# Altium PCB PCB1.PcbDoc
Units mm, origin at the board's own origin, x right, y up, seen from the top; angles counter-clockwise.
Board outline 83.06 x 84.33 mm, 2 copper layers (Top Layer, Bottom Layer); 15 components, 21 nets, 99 pads, 5 vias.
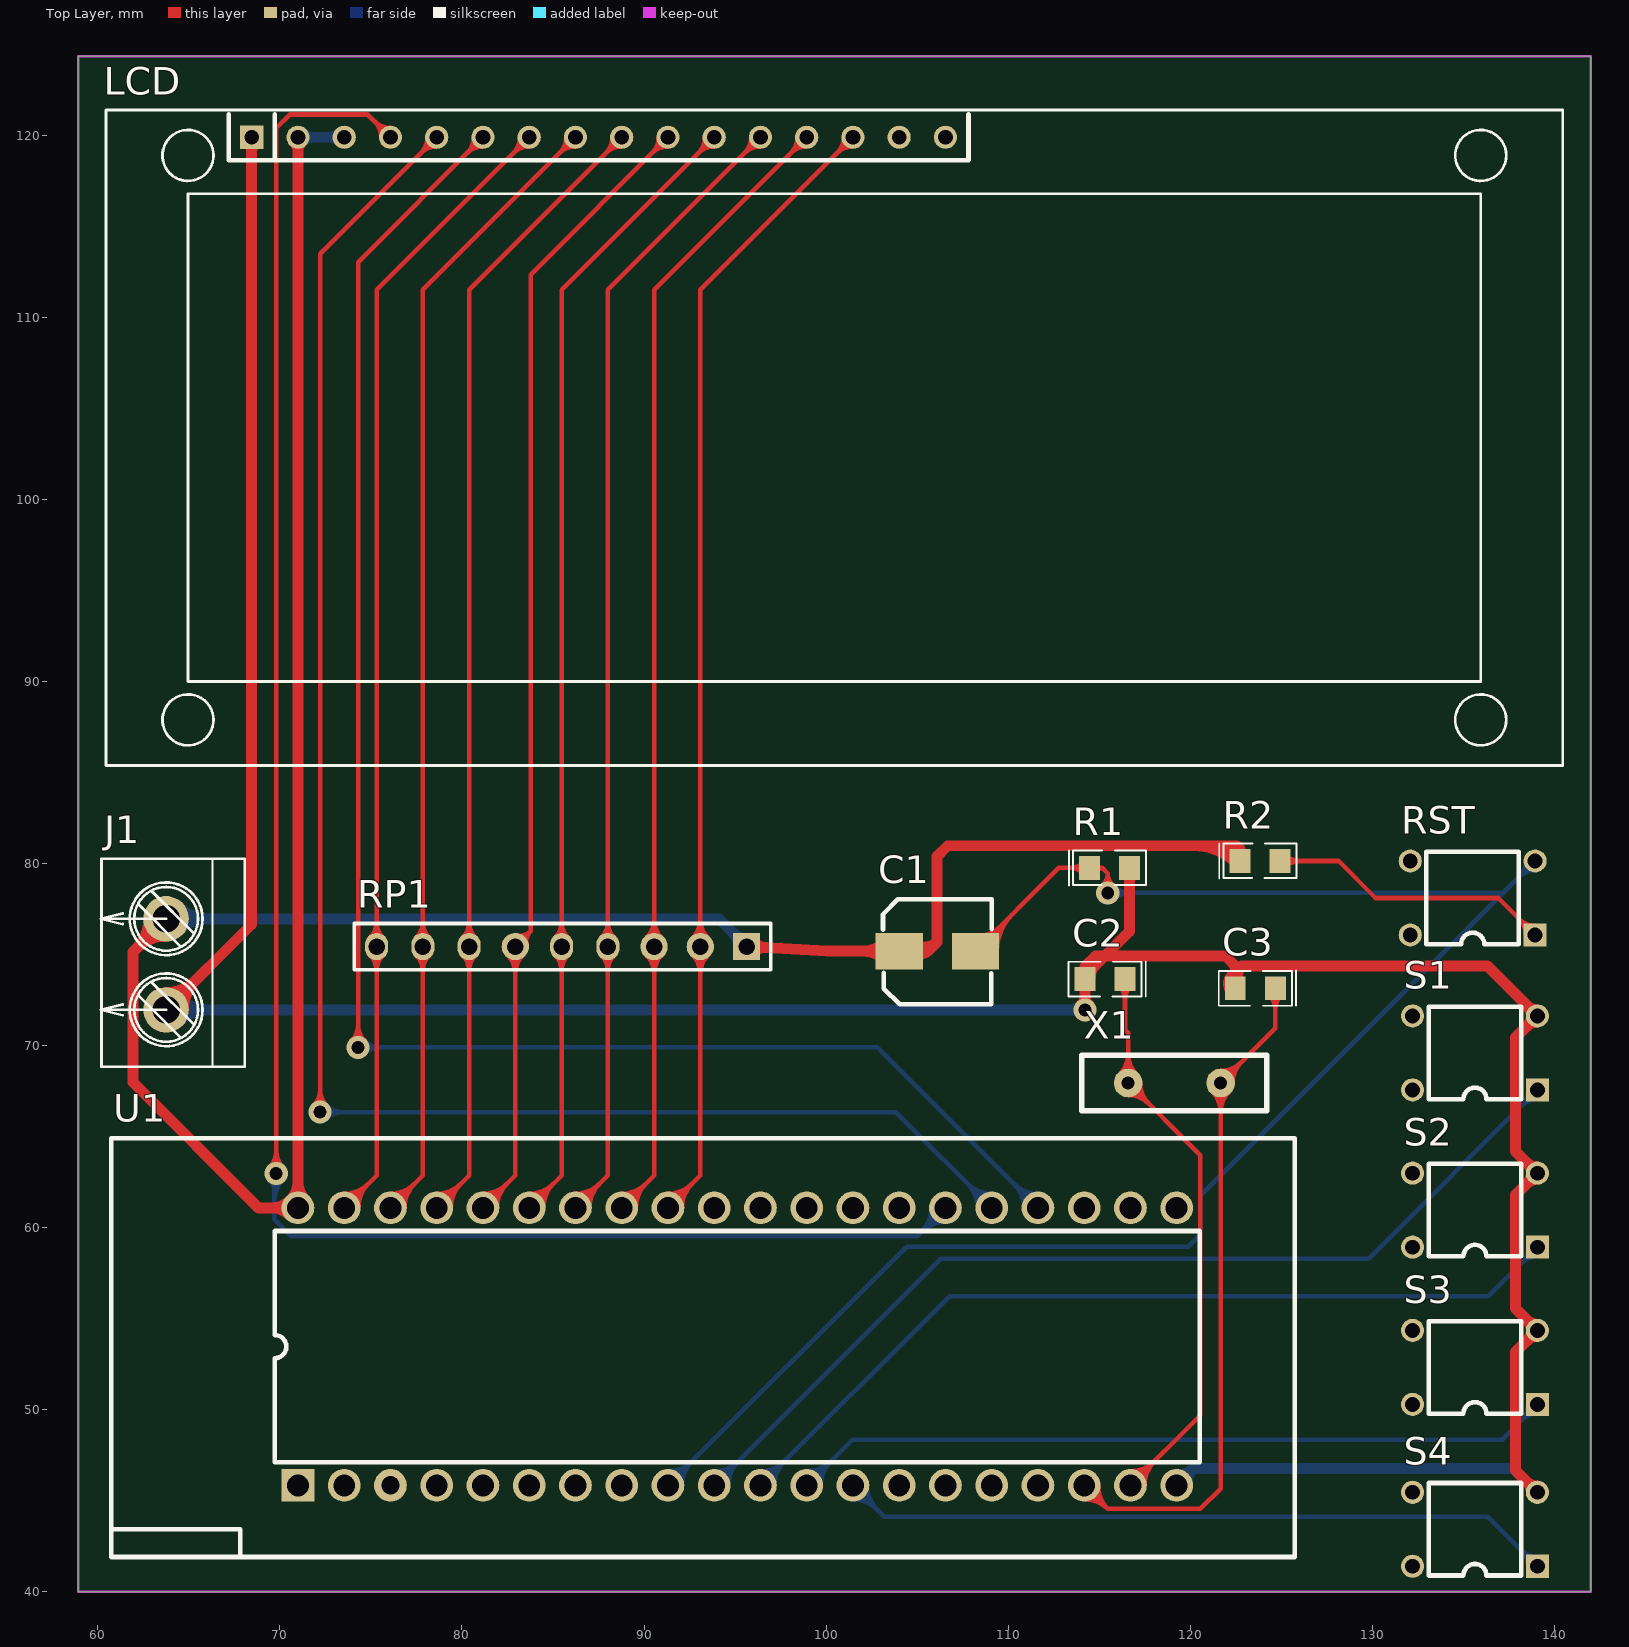
[diagram p0: Top Layer view]
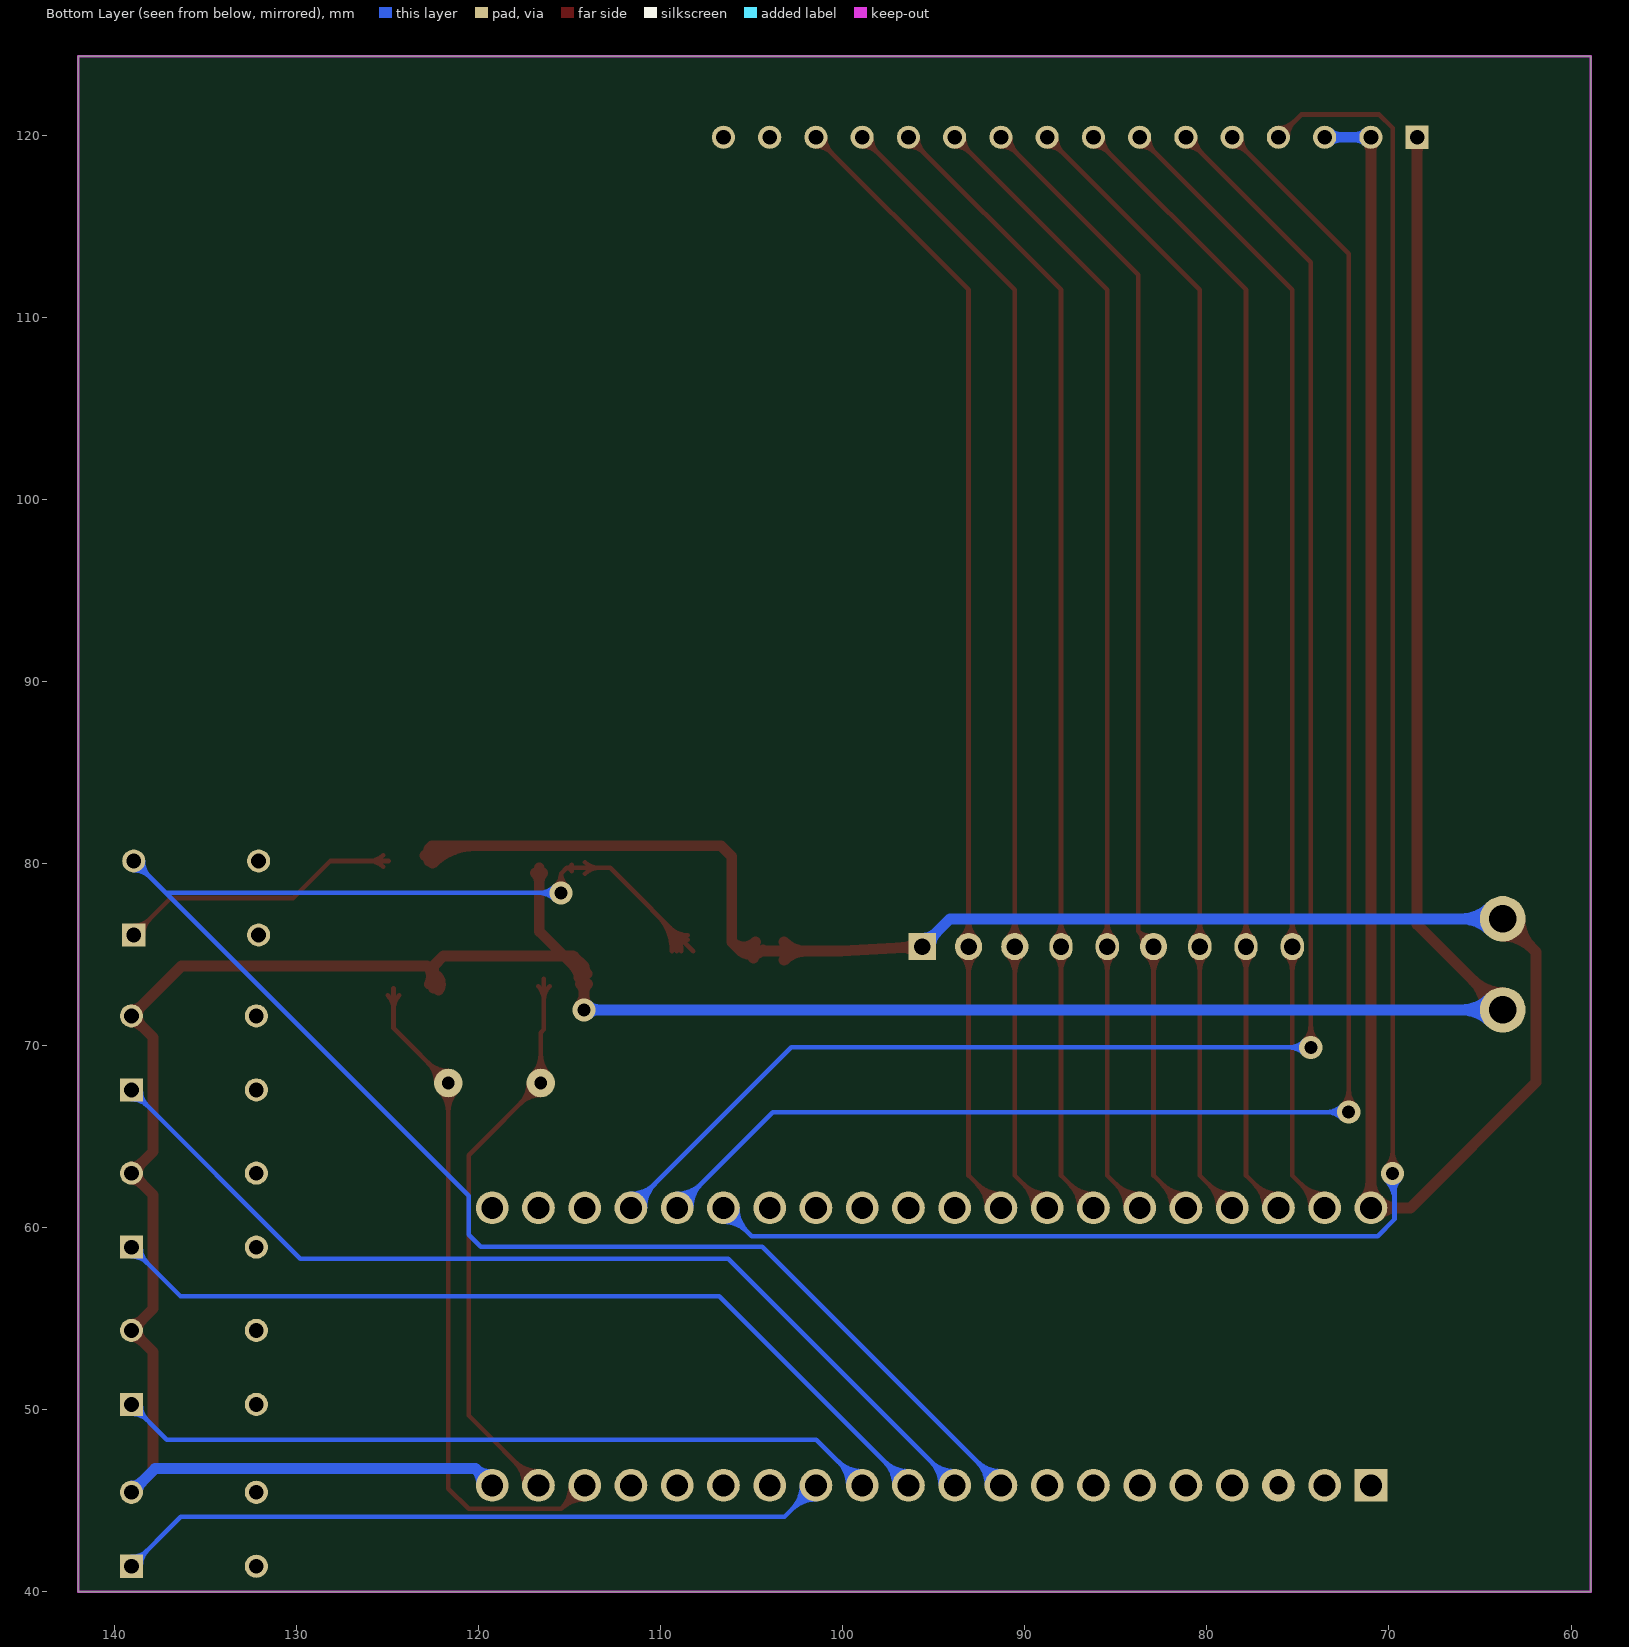
[diagram p1: Bottom Layer view, seen from below]
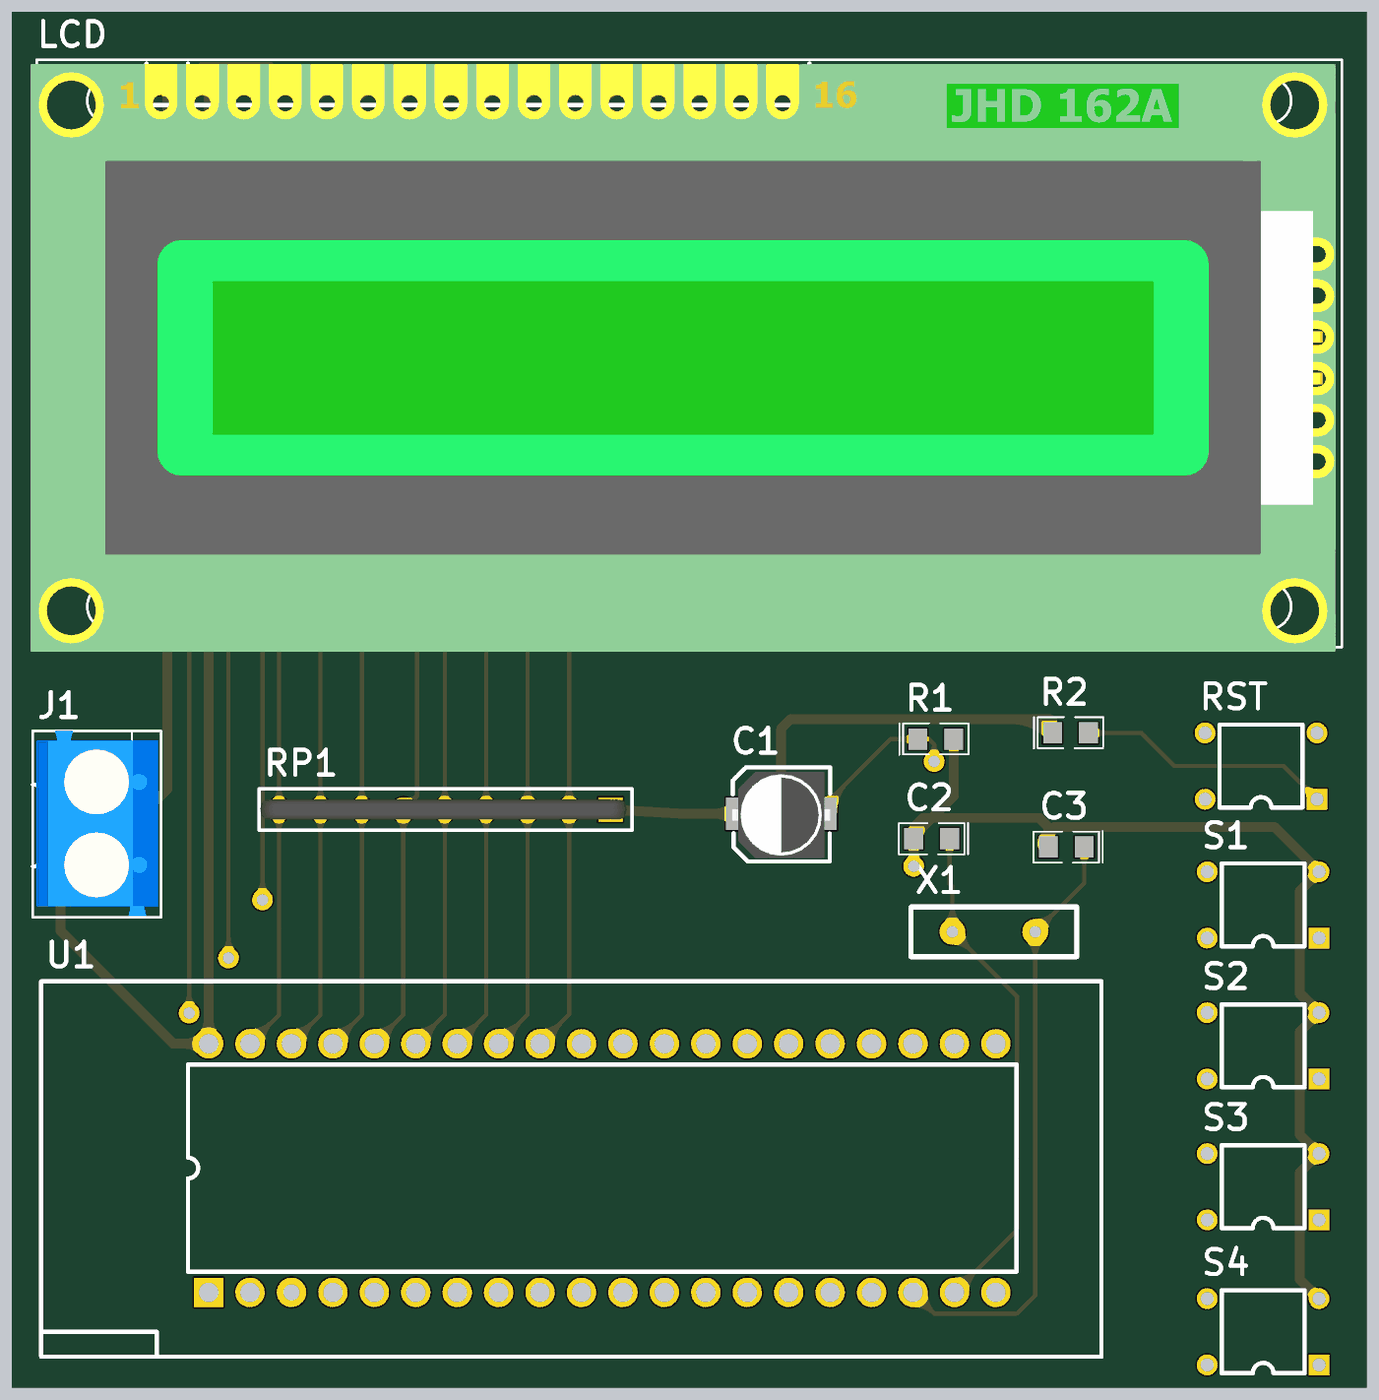
[diagram p2: 3D render of the assembled board from above, using the file's embedded part models]

## Layer stack, top to bottom
Top Solder: solder mask 0.0102, Solder Resist, Dk 3.5
Top Layer: signal copper 0.0356
Dielectric 1: dielectric 0.32, FR-4, Dk 4.8
Bottom Layer: signal copper 0.0356
Bottom Solder: solder mask 0.0102, Solder Resist, Dk 3.5

## Board outline
58.928,40.005 58.928,124.333 141.986,124.333 141.986,40.005

## Design rules (kind name [scope] priority, off if disabled: settings)
Clearance [All] p1: gap=0.254
PolygonConnect [All] p1: connectstyle=Relief reliefconductorwidth=0.254 reliefentries=4 polygonreliefangle="90 Angle" airgapwidth=0.254
RoutingVias [All] p1: holewidth=0.711 width=1.27 viastyle="Through Hole" minholewidth=0.711 minwidth=1.27 maxholewidth=0.711 maxwidth=1.27
SolderMaskExpansion [All] p1: expansion=0.102
Width Width_1 [InNetClass('New Class 1')] p1: maxlimit=0.254 minlimit=0.254 preferedwidth=0.254
Width [InNetClass('New Class')] p2: maxlimit=0.6 minlimit=0.254 preferedwidth=0.6
29 further rules are at their usual default settings.

## Classes and differential pairs
net class "New Class 1": D0 D1 D2 D3 D4 D5 D6 D7 EN NetC1_2 NetC2_1 NetC3_1 NetR2_2 P30 P31 P32 P33 RS WR
net class "New Class": GND VCC

## Components (designator, comment, footprint, x,y, rotation, side; value= is the part's Value field where it differs from the comment)
C1 "10uf" C_SMT-5*5 104.013,75.184 r0 top
C2 "30" C0805 115.316,73.66 r180 top
C3 "30" C0805 123.571,73.152 r180 top
J1 "CON2" TC2 63.754,76.962 r270 top
LCD "1602" LCD1602 68.453,119.888 r0 top
R1 "10K" C0805 115.57,79.756 r0 top
R2 "10K" C0805 123.825,80.137 r0 top
RP1 "103" R-9PIN 95.631,75.438 r180 top
RST "SW-PB" ANJIAN 135.509,75.565 r180 top
S1 "SW-PB" ANJIAN 135.636,67.056 r180 top
S2 "SW-PB" ANJIAN 135.636,58.42 r180 top
S3 "SW-PB" ANJIAN 135.636,49.784 r180 top
S4 "SW-PB" ANJIAN 135.636,40.894 r180 top
U1 "AT89C52" JINSUOZUO 125.73,41.91 r90 top
X1 "12MHz" XTAL1 116.586,67.945 r0 top

## Footprints (in the part's own frame and the unit in brackets; to place one, negate y for a bottom-side part, rotate by r counter-clockwise, add the part's x,y. Pads: shape width x height; smd on the part's side, far side on the other; paste and mask are expansions set on the pad)
ANJIAN [mil]
  rect 50x50 hole 32: 1(-135,-20)
  round 50 hole 32: 2(-135,-180) 3(135,-180) 4(135,-20)
  silkscreen extent -100,-200 100,0
C0805 [mm]
  rect 1.15x1.3 smd: 1(-1.1,0) 2(1.1,0)
  silkscreen extent -2.24,-0.97 2.01,0.97, body extent -0.97,-0.61 1.03,0.6, height 0.5
C_SMT-5*5 [mm] "贴片铝电解电容 5*5   22uf"
  rect 2.6x2 smd: 1(0,0) 2(4.191,0)
  silkscreen extent -0.89,-2.92 5.08,2.84, body extent -0.92,-2.73 5.08,2.57, height 5.9
JINSUOZUO [mm]
  rect 1.8x1.8 hole 1.2: 1(3.937,54.737)
  round 1.8 hole 1.2: 2(3.937,52.197) 4(3.937,47.117) 5(3.937,44.577) 6(3.937,42.037) 7(3.937,39.497) 8(3.937,36.957) 9(3.937,34.417) 10(3.937,31.877) 11(3.937,29.337) 12(3.937,26.797) 13(3.937,24.257) 14(3.937,21.717) 15(3.937,19.177) 16(3.937,16.637) 17(3.937,14.097) 18(3.937,11.557) 19(3.937,9.017) 20(3.937,6.477) 21(19.177,6.477) 22(19.177,9.017) 23(19.177,11.557) 24(19.177,14.097) 25(19.177,16.637) 26(19.177,19.177) 27(19.177,21.717) 28(19.177,24.257) 29(19.177,26.797) 30(19.177,29.337) 31(19.177,31.877) 32(19.177,34.417) 33(19.177,36.957) 34(19.177,39.497) 35(19.177,42.037) 36(19.177,44.577) 37(19.177,47.117) 38(19.177,49.657) 39(19.177,52.197) 40(19.177,54.737)
  round 1.8 hole 1: 3(3.937,49.657)
  silkscreen extent 0,0 23,65
LCD1602 [mil]
  rect 50x50 hole 32: 1(0,0)
  round 50 hole 32: 2(100,0) 3(200,0) 4(300,0) 5(400,0) 6(500,0) 7(600,0) 8(700,0) 9(800,0) 10(900,0) 11(1000,0) 12(1100,0) 13(1200,0) 14(1300,0) 15(1400,0) 16(1500,0)
  silkscreen extent -315,-1358 2835,59, body extent -330,-1369 2820,49, height 417
R-9PIN [mm]
  rect 1.5x1.5 hole 0.9: 1(0,0)
  round 1.5 hole 0.9: 2(2.54,0) 3(5.08,0) 6(12.7,0)
  oval 1.27x1.5 hole 0.9: 4(7.62,0) 5(10.16,0) 7(15.24,0) 8(17.78,0) 9(20.32,0)
  silkscreen extent -1.32,-1.27 21.54,1.27, body extent -1.01,-0.63 21.49,0.61, height 5.3
TC2 [mm] "2头接线端子（5.08）"
  round 2.5 hole 1.5: 1(0,0) 2(5,0)
  silkscreen extent -3.3,-3.59 8.13,4.32, body extent -3.31,-3.33 8.05,4.17, height 10.25
XTAL1 [mil]
  round 62 hole 28: 1(0,0) 2(200,0)
  silkscreen extent -100,-60 300,60

## Part data
C1: library part 电解电容, "Capacitor"
C2 C3: library part CAP, "Capacitor"
J1: "Connector"
LCD: library part LCM1602
R1 R2: library part RES2
RP1: library part RP8
U1: library part AT89C51, "8-Bit Microcontroller with 4K Flash ROM"
X1: library part CRYSTAL, "Crystal"

## Via types
v1: diameter 1.27, hole 0.711, Top Layer to Bottom Layer, 5 vias

## Nets (pads, with @x,y where several pads share a name; then routed paths per layer and width w, separated by ;. In a path a pad name is that pad's centre, name@x,y a point inside that pad or via, vN(x,y) a via of type N, cw(c..) or ccw(c..) an arc to the next point about the centre after c; other vN are vias at no path point)
D0: LCD.7 RP1.9 U1.39 | length 73.7
  Top Layer w0.254: U1.39 75.311,62.865 RP1.9 75.311,111.506 LCD.7 ; U1.39@73.533,61.606 ccw(c73.533,62.859) 74.419,61.973 ccw(c75.305,61.087) U1.39@74.052,61.087 ; U1.39@73.533,61.86 ccw(c73.533,63.726) 74.853,62.407 ccw(c76.172,61.087) U1.39@74.306,61.087 ; RP1.9@74.952,74.964 cw(c74.085,74.097) 75.311,74.097 cw(c76.537,74.097) RP1.9@75.67,74.964 ; RP1.9@74.952,75.912 ccw(c74.085,76.779) 75.311,76.779 ccw(c76.537,76.779) RP1.9@75.67,75.912 ; LCD.7@83.185,119.888 cw(c81.959,119.888) 82.826,119.021 cw(c83.693,118.154) LCD.7@83.693,119.38
D1: LCD.8 RP1.8 U1.38 | length 73.7
  Top Layer w0.254: U1.38 77.851,62.865 RP1.8 77.851,111.506 LCD.8 ; U1.38@76.073,61.606 ccw(c76.073,62.859) 76.959,61.973 ccw(c77.845,61.087) U1.38@76.592,61.087 ; U1.38@76.073,61.86 ccw(c76.073,63.726) 77.393,62.407 ccw(c78.712,61.087) U1.38@76.846,61.087 ; RP1.8@77.492,74.964 cw(c76.625,74.097) 77.851,74.097 cw(c79.077,74.097) RP1.8@78.21,74.964 ; RP1.8@77.492,75.912 ccw(c76.625,76.779) 77.851,76.779 ccw(c79.077,76.779) RP1.8@78.21,75.912 ; LCD.8@85.725,119.888 cw(c84.499,119.888) 85.366,119.021 cw(c86.233,118.154) LCD.8@86.233,119.38
D2: LCD.9 RP1.7 U1.37 | length 73.7
  Top Layer w0.254: U1.37 80.391,62.865 RP1.7 80.391,111.506 LCD.9 ; U1.37@78.613,61.606 ccw(c78.613,62.859) 79.499,61.973 ccw(c80.385,61.087) U1.37@79.132,61.087 ; U1.37@78.613,61.86 ccw(c78.613,63.726) 79.933,62.407 ccw(c81.252,61.087) U1.37@79.386,61.087 ; RP1.7@80.032,74.964 cw(c79.165,74.097) 80.391,74.097 cw(c81.617,74.097) RP1.7@80.75,74.964 ; RP1.7@80.032,75.912 ccw(c79.165,76.779) 80.391,76.779 ccw(c81.617,76.779) RP1.7@80.75,75.912 ; LCD.9@88.265,119.888 cw(c87.039,119.888) 87.906,119.021 cw(c88.773,118.154) LCD.9@88.773,119.38
D3: LCD.10 RP1.6 U1.36 | length 75.2
  Top Layer w0.254: U1.36 82.931,62.865 RP1.6 83.769,76.276 ; U1.36@81.153,61.606 ccw(c81.153,62.859) 82.039,61.973 ccw(c82.925,61.087) U1.36@81.672,61.087 ; U1.36@81.153,61.86 ccw(c81.153,63.726) 82.473,62.407 ccw(c83.792,61.087) U1.36@81.926,61.087 ; RP1.6@82.49,74.997 cw(c81.427,73.934) 82.931,73.934 cw(c84.435,73.934) RP1.6@83.372,74.997 ; RP1.6@82.67,75.177 cw(c82.04,74.547) 82.931,74.547 cw(c83.822,74.547) RP1.6@83.192,75.177 ; RP1.6@83.044,76.051 ccw(c83.192,76.853) 83.769,76.276 ; RP1.6@83.544,75.551 cw(c84.346,75.699) 83.769,76.276 ; LCD.10@90.805,119.888 cw(c89.579,119.888) 90.446,119.021 cw(c91.313,118.154) LCD.10@91.313,119.38 ; LCD.10 83.769,112.344 83.769,76.276
D4: LCD.11 RP1.5 U1.35 | length 73.7
  Top Layer w0.254: U1.35 85.471,62.865 RP1.5 85.471,111.506 LCD.11 ; U1.35@83.693,61.606 ccw(c83.693,62.859) 84.579,61.973 ccw(c85.465,61.087) U1.35@84.212,61.087 ; U1.35@83.693,61.86 ccw(c83.693,63.726) 85.013,62.407 ccw(c86.332,61.087) U1.35@84.466,61.087 ; RP1.5@85.112,74.964 cw(c84.245,74.097) 85.471,74.097 cw(c86.697,74.097) RP1.5@85.83,74.964 ; RP1.5@85.112,75.912 ccw(c84.245,76.779) 85.471,76.779 ccw(c86.697,76.779) RP1.5@85.83,75.912 ; LCD.11@93.345,119.888 cw(c92.119,119.888) 92.986,119.021 cw(c93.853,118.154) LCD.11@93.853,119.38
D5: LCD.12 RP1.4 U1.34 | length 73.7
  Top Layer w0.254: U1.34 88.011,62.865 RP1.4 88.011,111.506 LCD.12 ; U1.34@86.233,61.606 ccw(c86.233,62.859) 87.119,61.973 ccw(c88.005,61.087) U1.34@86.752,61.087 ; U1.34@86.233,61.86 ccw(c86.233,63.726) 87.553,62.407 ccw(c88.872,61.087) U1.34@87.006,61.087 ; RP1.4@87.652,74.964 cw(c86.785,74.097) 88.011,74.097 cw(c89.237,74.097) RP1.4@88.37,74.964 ; RP1.4@87.652,75.912 ccw(c86.785,76.779) 88.011,76.779 ccw(c89.237,76.779) RP1.4@88.37,75.912 ; LCD.12@95.885,119.888 cw(c94.659,119.888) 95.526,119.021 cw(c96.393,118.154) LCD.12@96.393,119.38
D6: LCD.13 RP1.3 U1.33 | length 77.4
  Top Layer w0.254: U1.33 90.551,62.865 RP1.3 90.551,111.506 LCD.13 ; U1.33@88.773,61.606 ccw(c88.773,62.859) 89.659,61.973 ccw(c90.545,61.087) U1.33@89.292,61.087 ; U1.33@88.773,61.86 ccw(c88.773,63.726) 90.093,62.407 ccw(c91.412,61.087) U1.33@89.546,61.087 ; RP1.3@90.11,74.997 cw(c89.047,73.934) 90.551,73.934 cw(c92.055,73.934) RP1.3@90.992,74.997 ; RP1.3@90.11,75.879 ccw(c89.047,76.942) 90.551,76.942 ccw(c92.055,76.942) RP1.3@90.992,75.879 ; RP1.3@90.29,75.177 cw(c89.66,74.547) 90.551,74.547 cw(c91.442,74.547) RP1.3@90.812,75.177 ; RP1.3@90.29,75.699 ccw(c89.66,76.329) 90.551,76.329 ccw(c91.442,76.329) RP1.3@90.812,75.699 ; LCD.13@98.425,119.888 cw(c97.199,119.888) 98.066,119.021 cw(c98.933,118.154) LCD.13@98.933,119.38
D7: LCD.14 RP1.2 U1.32 | length 77.4
  Top Layer w0.254: U1.32 93.091,62.865 RP1.2 93.091,111.506 LCD.14 ; U1.32@91.313,61.606 ccw(c91.313,62.859) 92.199,61.973 ccw(c93.085,61.087) U1.32@91.832,61.087 ; U1.32@91.313,61.86 ccw(c91.313,63.726) 92.633,62.407 ccw(c93.952,61.087) U1.32@92.086,61.087 ; RP1.2@92.65,74.997 cw(c91.587,73.934) 93.091,73.934 cw(c94.595,73.934) RP1.2@93.532,74.997 ; RP1.2@92.65,75.879 ccw(c91.587,76.942) 93.091,76.942 ccw(c94.595,76.942) RP1.2@93.532,75.879 ; RP1.2@92.83,75.177 cw(c92.2,74.547) 93.091,74.547 cw(c93.982,74.547) RP1.2@93.352,75.177 ; RP1.2@92.83,75.699 ccw(c92.2,76.329) 93.091,76.329 ccw(c93.982,76.329) RP1.2@93.352,75.699 ; LCD.14@100.965,119.888 cw(c99.739,119.888) 100.606,119.021 cw(c101.473,118.154) LCD.14@101.473,119.38
EN: LCD.6 U1.24 | length 104.5
  Top Layer w0.254: v1@73.936,70.26 ccw(c73.069,71.127) 74.295,71.127 ccw(c75.521,71.127) v1@74.654,70.26 ; v1(74.295,69.901) 74.295,113.03 LCD.6 ; LCD.6@80.645,119.888 cw(c79.419,119.888) 80.286,119.021 cw(c81.153,118.154) LCD.6@81.153,119.38
  Bottom Layer w0.254: v1(74.295,69.901) 102.819,69.901 U1.24 ; v1@74.654,69.542 cw(c75.521,68.674) 75.521,69.901 cw(c75.521,71.127) v1@74.654,70.26 ; U1.24@110.86,61.087 ccw(c108.994,61.087) 110.313,62.407 ccw(c111.633,63.726) U1.24@111.633,61.86 ; U1.24@111.114,61.087 ccw(c109.861,61.087) 110.747,61.973 ccw(c111.633,62.859) U1.24@111.633,61.606
GND: C2.2 C3.2 J1.2 LCD.1 R1.2 S1.2 S2.2 S3.2 S4.2 U1.20 | length 220.4
  Top Layer w0.6: J1.2 68.453,76.661 LCD.1 ; J1.2@63.754,72.912 ccw(c63.754,75.206) 65.376,73.584 ccw(c66.997,71.962) J1.2@64.704,71.962 ; LCD.1@68.216,119.651 cw(c67.644,119.079) 68.453,119.079 cw(c69.262,119.079) LCD.1@68.69,119.651 ; v1@113.979,72.199 ccw(c113.407,72.771) 114.216,72.771 ccw(c115.025,72.771) v1@114.453,72.199 ; C2.2@114.022,73.391 cw(c113.552,72.921) 114.216,72.921 cw(c114.88,72.921) C2.2@114.41,73.391 ; C2.2@114.036,73.943 ccw(c113.692,74.338) 114.216,74.338 ; v1(114.216,71.962) C2.2 C2.2@114.216,73.822 ; C2.2@114.396,73.943 cw(c114.739,74.338) 114.216,74.338 ; C2.2@114.484,73.797 cw(c115.666,74.072) 114.808,74.93 ; C2.2@114.491,73.735 cw(c115.365,73.735) 114.747,74.353 ; R1.2@116.476,79.487 cw(c116.006,79.017) 116.67,79.017 cw(c117.334,79.017) R1.2@116.864,79.487 ; R1.2 116.67,76.276 115.324,74.93 ; C3.2@122.193,73.058 cw(c122.732,73.385) 122.286,73.831 ; C3.2 122.471,74.016 ; C3.2@122.706,73.37 cw(c123.404,73.794) 122.827,74.371 ; S4.2@138.73,45.466 ccw(c137.921,45.466) 138.493,46.038 ccw(c139.065,46.61) S4.2@139.065,45.801 ; S4.2 137.871,46.66 137.871,53.162 S3.2 137.871,55.55 137.871,61.798 S2.2 137.871,64.186 137.871,70.434 S1.2 136.322,74.371 122.827,74.371 ; S3.2@139.065,54.021 ccw(c139.065,53.212) 138.493,53.784 ccw(c137.921,54.356) 138.73,54.356 ccw(c137.921,54.356) 138.493,54.928 ccw(c139.065,55.5) S3.2@139.065,54.691 ; S2.2@139.065,62.657 ccw(c139.065,61.848) 138.493,62.42 ccw(c137.921,62.992) 138.73,62.992 ccw(c137.921,62.992) 138.493,63.564 ccw(c139.065,64.136) S2.2@139.065,63.327 ; S1.2@139.065,71.293 ccw(c139.065,70.484) 138.493,71.056 ccw(c137.921,71.628) 138.73,71.628 ccw(c137.921,71.628) 138.493,72.2 ccw(c139.065,72.772) S1.2@139.065,71.963 ; C2.2@114.216,73.822 115.324,74.93 ; C2.2@114.216,73.822 114.216,74.338 ; 114.216,74.338 114.808,74.93 ; 114.808,74.93 115.324,74.93 ; 115.324,74.93 121.92,74.93 122.471,74.379 122.471,74.016 ; C3.2@122.277,73.421 ccw(c121.807,73.891) 122.471,73.891 ; C3.2@122.277,73.421 ccw(c121.807,73.891) 122.471,73.891 ; C3.2@122.277,73.421 ccw(c121.807,73.891) 122.471,73.891 ; 122.471,73.891 ccw(c123.135,73.891) C3.2@122.665,73.421 ; 122.471,73.891 ccw(c123.135,73.891) C3.2@122.665,73.421 ; 122.471,73.891 ccw(c123.135,73.891) C3.2@122.665,73.421 ; 122.471,74.016 122.827,74.371
  Bottom Layer w0.6: J1.2 v1(114.216,71.962) ; J1.2@64.426,71.29 cw(c66.047,69.669) 66.047,71.962 cw(c66.047,74.256) J1.2@64.426,72.634 ; v1@113.979,71.725 ccw(c113.407,71.153) 113.407,71.962 ccw(c113.407,72.771) v1@113.979,72.199 ; U1.20 120.167,46.761 ; U1.20@119.303,46.445 ccw(c119.394,47.535) 120.167,46.761 ; U1.20@119.851,45.897 cw(c120.941,45.988) 120.167,46.761 ; S4.2@138.73,45.466 ccw(c137.921,45.466) 138.493,46.038 ccw(c139.065,46.61) S4.2@139.065,45.801 ; S4.2 137.77,46.761 120.167,46.761
NetC1_2: C1.2 R1.1 RST.2 U1.9 | length 114.8
  Top Layer w0.254: C1.2 112.776,79.756 R1.1 115.164,79.756 ; C1.2@108.504,75.803 ccw(c108.504,76.573) C1.2@109.049,76.029 ; C1.2@108.504,76.057 ccw(c108.504,77.44) 109.482,76.462 ; C1.2@108.869,75.184 cw(c110.474,75.184) 109.339,76.319 ; C1.2@109.123,75.184 cw(c111.342,75.184) 109.773,76.753 ; C1.2@109.377,75.184 cw(c112.209,75.184) 110.206,77.186 ; R1.1@114.153,79.439 ccw(c113.388,78.674) 113.388,79.756 ccw(c113.388,80.838) R1.1@114.153,80.073 ; R1.1@114.878,79.572 cw(c115.164,79.443) 115.164,79.756 ; R1.1@114.878,79.94 ccw(c115.164,80.069) 115.164,79.756 ; v1@115.148,78.779 ccw(c114.602,79.451) 115.468,79.451 ; v1(115.468,78.384) 115.468,79.451 ; v1@115.789,78.779 cw(c116.334,79.451) 115.468,79.451 ; 115.164,79.756 115.468,79.451
  Bottom Layer w0.254: U1.9 104.419,58.953 119.888,58.953 120.548,59.614 120.548,61.747 137.185,78.384 ; U1.9@91.313,46.366 ccw(c91.313,47.619) 92.199,46.733 ccw(c93.085,45.847) U1.9@91.832,45.847 ; U1.9@91.313,46.62 ccw(c91.313,48.486) 92.633,47.167 ccw(c93.952,45.847) U1.9@92.086,45.847 ; v1(115.468,78.384) 137.185,78.384 ; v1@115.828,78.025 cw(c116.695,77.158) 116.695,78.384 cw(c116.695,79.611) v1@115.828,78.744 ; RST.2@138.43,80.137 cw(c137.204,80.137) 138.071,79.27 cw(c138.938,78.403) RST.2@138.938,79.629 ; RST.2 137.185,78.384
NetC2_1: C2.1 U1.19 X1.1 | length 45.8
  Top Layer w0.254: C2.1@116.099,73.268 cw(c115.334,72.503) 116.416,72.503 cw(c117.498,72.503) C2.1@116.733,73.268 ; X1.1@116.119,68.412 ccw(c114.992,69.539) 116.586,69.539 ccw(c118.18,69.539) X1.1@117.053,68.412 ; X1.1@116.299,68.232 ccw(c115.605,68.926) 116.586,68.926 ccw(c117.567,68.926) X1.1@116.873,68.232 ; C2.1 116.416,70.884 116.586,70.714 X1.1 120.548,63.983 120.548,49.682 U1.19 ; X1.1@116.586,67.285 cw(c116.586,65.69) 117.713,66.818 cw(c118.841,67.945) X1.1@117.246,67.945 ; X1.1@116.586,67.539 cw(c116.586,66.557) 117.28,67.251 cw(c117.974,67.945) X1.1@116.992,67.945 ; U1.19@116.713,46.366 ccw(c116.713,47.619) 117.599,46.733 ccw(c118.485,45.847) U1.19@117.232,45.847 ; U1.19@116.713,46.62 ccw(c116.713,48.486) 118.033,47.167 ccw(c119.352,45.847) U1.19@117.486,45.847
NetC3_1: C3.1 U1.18 X1.2 | length 51.8
  Top Layer w0.254: U1.18 115.468,44.552 ; U1.18@114.18,45.328 cw(c114.196,44.13) 115.043,44.977 cw(c115.89,45.824) U1.18@114.692,45.84 ; U1.18@114.183,45.074 cw(c114.207,43.29) 115.468,44.552 ; U1.18@114.946,45.837 ccw(c116.73,45.813) 115.468,44.552 ; X1.2@121.199,67.478 cw(c120.072,66.351) 121.666,66.351 cw(c123.26,66.351) X1.2@122.133,67.478 ; X1.2@121.379,67.658 cw(c120.685,66.964) 121.666,66.964 cw(c122.647,66.964) X1.2@121.953,67.658 ; X1.2@121.666,68.351 ccw(c121.666,69.333) 122.36,68.639 ccw(c123.054,67.945) X1.2@122.072,67.945 ; X1.2@121.666,68.605 ccw(c121.666,70.2) 122.793,69.072 ccw(c123.921,67.945) X1.2@122.326,67.945 ; C3.1@124.354,72.76 cw(c123.589,71.995) 124.671,71.995 cw(c125.753,71.995) C3.1@124.988,72.76 ; C3.1 124.671,70.95 X1.2 121.666,45.669 120.548,44.552 115.468,44.552
NetR2_2: R2.2 RST.1 | length 19.3
  Top Layer w0.254: R2.2 128.143,80.137 130.175,78.105 136.906,78.105 RST.1 ; R2.2@125.242,79.82 cw(c126.007,79.055) 126.007,80.137 cw(c126.007,81.219) R2.2@125.242,80.454 ; RST.1@138.43,76.073 ccw(c137.204,76.073) 138.071,76.94 ccw(c138.938,77.807) RST.1@138.938,76.581
P30: S1.1 U1.10 | length 61
  Bottom Layer w0.254: U1.10 106.299,58.293 129.794,58.293 S1.1 ; U1.10@93.853,46.366 ccw(c93.853,47.619) 94.739,46.733 ccw(c95.625,45.847) U1.10@94.372,45.847 ; U1.10@93.853,46.62 ccw(c93.853,48.486) 95.173,47.167 ccw(c96.492,45.847) U1.10@94.626,45.847 ; S1.1@138.557,67.564 cw(c137.331,67.564) 138.198,66.697 cw(c139.065,65.83) S1.1@139.065,67.056
P31: S2.1 U1.11 | length 54.9
  Bottom Layer w0.254: U1.11 106.782,56.236 136.373,56.236 S2.1 ; U1.11@96.393,46.366 ccw(c96.393,47.619) 97.279,46.733 ccw(c98.165,45.847) U1.11@96.912,45.847 ; U1.11@96.393,46.62 ccw(c96.393,48.486) 97.713,47.167 ccw(c99.032,45.847) U1.11@97.166,45.847 ; S2.1@138.557,58.928 cw(c137.331,58.928) 138.198,58.061 cw(c139.065,57.194) S2.1@139.065,58.42
P32: S3.1 U1.12 | length 48.8
  Bottom Layer w0.254: U1.12 101.448,48.362 137.135,48.362 S3.1 ; U1.12@98.933,46.366 ccw(c98.933,47.619) 99.819,46.733 ccw(c100.705,45.847) U1.12@99.452,45.847 ; U1.12@98.933,46.62 ccw(c98.933,48.486) 100.253,47.167 ccw(c101.572,45.847) U1.12@99.706,45.847 ; S3.1@138.557,50.292 cw(c137.331,50.292) 138.198,49.425 cw(c139.065,48.558) S3.1@139.065,49.784
P33: S4.1 U1.13 | length 46.3
  Bottom Layer w0.254: U1.13@101.473,45.074 cw(c101.473,43.208) 102.793,44.527 cw(c104.112,45.847) U1.13@102.246,45.847 ; U1.13@101.473,45.328 cw(c101.473,44.075) 102.359,44.961 cw(c103.245,45.847) U1.13@101.992,45.847 ; U1.13 103.2,44.12 136.347,44.12 S4.1 ; S4.1@138.557,41.402 ccw(c137.331,41.402) 138.198,42.269 ccw(c139.065,43.136) S4.1@139.065,41.91
RS: LCD.4 U1.26 | length 116.4
  Top Layer w0.254: v1@69.44,63.326 ccw(c68.573,64.193) 69.799,64.193 ccw(c71.026,64.193) v1@70.158,63.326 ; v1(69.799,62.967) 69.799,120.396 70.536,121.133 74.828,121.133 LCD.4 ; LCD.4@75.565,119.888 ccw(c74.339,119.888) 75.206,120.755 ccw(c76.073,121.622) LCD.4@76.073,120.396
  Bottom Layer w0.254: v1@69.44,62.607 cw(c68.818,61.985) 69.698,61.985 ; 69.698,61.495 cw(c71.271,61.495) v1@70.158,62.607 ; 69.698,62.108 cw(c70.658,62.108) v1@69.979,62.787 ; v1(69.799,62.967) 69.698,62.865 69.698,60.452 70.612,59.538 105.004,59.538 U1.26 ; U1.26@105.78,61.087 cw(c103.914,61.087) 105.233,59.767 cw(c106.553,58.448) U1.26@106.553,60.314 ; U1.26@106.034,61.087 cw(c104.781,61.087) 105.667,60.201 cw(c106.553,59.315) U1.26@106.553,60.568
VCC: C1.1 J1.1 LCD.2 LCD.3 R2.1 RP1.1 U1.40 | length 179.5
  Top Layer w0.6: J1.1@62.804,76.962 cw(c60.511,76.962) 62.132,75.34 cw(c63.754,73.719) J1.1@63.754,76.012 ; J1.1 61.925,75.133 61.925,67.987 68.825,61.087 U1.40 LCD.2 ; U1.40@70.569,60.663 ccw(c69.544,59.638) 69.544,61.087 ccw(c69.544,62.536) 70.569,61.511 ccw(c69.544,62.536) 70.993,62.536 ccw(c72.442,62.536) U1.40@71.417,61.511 ; LCD.2@70.756,119.651 cw(c70.184,119.079) 70.993,119.079 cw(c71.802,119.079) LCD.2@71.23,119.651 ; RP1.1 100.076,75.184 C1.1 105.588,75.184 ; RP1.1@95.931,75.102 cw(c96.654,74.291) 96.716,75.376 cw(c96.778,76.461) RP1.1@95.967,75.738 ; C1.1@103.218,74.689 ccw(c102.023,73.494) 102.023,75.184 ccw(c102.023,76.874) C1.1@103.218,75.679 ; C1.1@104.383,75.256 ccw(c105.021,75.908) 105.667,75.263 ; C1.1@104.802,75.685 ccw(c105.445,76.342) 106.096,75.692 ; C1.1@104.904,74.808 cw(c105.588,74.373) 105.588,75.184 ; C1.1@104.904,75.56 ccw(c105.588,75.995) 105.588,75.184 ; 120.219,80.975 cw(c120.219,77.706) R2.1@122.531,80.018 ; 121.667,80.975 cw(c121.667,79.154) R2.1@122.955,80.442 ; R2.1@122.547,80.422 ccw(c122.223,80.805) 122.725,80.805 ; R2.1 122.725,80.805 ; R2.1@122.903,80.422 cw(c123.227,80.805) 122.725,80.805 ; 105.588,75.184 106.096,75.692 ; 106.096,75.692 106.096,80.391 106.68,80.975 122.555,80.975 122.725,80.805
  Bottom Layer w0.6: J1.1 94.107,76.962 RP1.1 ; J1.1@64.426,76.29 cw(c66.047,74.669) 66.047,76.962 cw(c66.047,79.255) J1.1@64.426,77.634 ; LCD.2 LCD.3 ; LCD.2@71.23,119.651 cw(c71.802,119.079) 71.802,119.888 cw(c71.802,120.697) LCD.2@71.23,120.125 ; LCD.3@73.296,119.651 ccw(c72.724,119.079) 72.724,119.888 ccw(c72.724,120.697) LCD.3@73.296,120.125 ; RP1.1@95.181,75.438 ccw(c94.095,75.438) 94.863,76.206 ccw(c95.631,76.974) RP1.1@95.631,75.888
WR: LCD.5 U1.25 | length 105.9
  Top Layer w0.254: v1@71.853,66.704 ccw(c70.986,67.571) 72.212,67.571 ccw(c73.439,67.571) v1@72.571,66.704 ; v1(72.212,66.345) 72.212,113.487 LCD.5 ; LCD.5@78.105,119.888 cw(c76.879,119.888) 77.746,119.021 cw(c78.613,118.154) LCD.5@78.613,119.38
  Bottom Layer w0.254: v1(72.212,66.345) 103.835,66.345 U1.25 ; v1@72.571,65.986 cw(c73.439,65.118) 73.439,66.345 cw(c73.439,67.571) v1@72.571,66.704 ; U1.25@108.32,61.087 ccw(c106.454,61.087) 107.773,62.407 ccw(c109.093,63.726) U1.25@109.093,61.86 ; U1.25@108.574,61.087 ccw(c107.321,61.087) 108.207,61.973 ccw(c109.093,62.859) U1.25@109.093,61.606
pads on no net: LCD.15 LCD.16 RST.3 RST.4 S1.3 S1.4 S2.3 S2.4 S3.3 S3.4 S4.3 S4.4 U1.1 U1.2 U1.3 U1.4 U1.5 U1.6 U1.7 U1.8 U1.14 U1.15 U1.16 U1.17 U1.21 U1.22 U1.23 U1.27 U1.28 U1.29 U1.30 U1.31

## Keep-outs
Keep-Out Layer:
  the board outline again, w0.132